# Altium PCB CCP_PCB.PcbDoc
Units mil, origin at the board's own origin, x right, y up, seen from the top; angles counter-clockwise.
Board outline 6000 x 4000 mil, 2 copper layers (Top Layer, Bottom Layer); 58 components, 52 nets, 259 pads, 7 vias.
Unrouted connection lines stored in the file: 34.
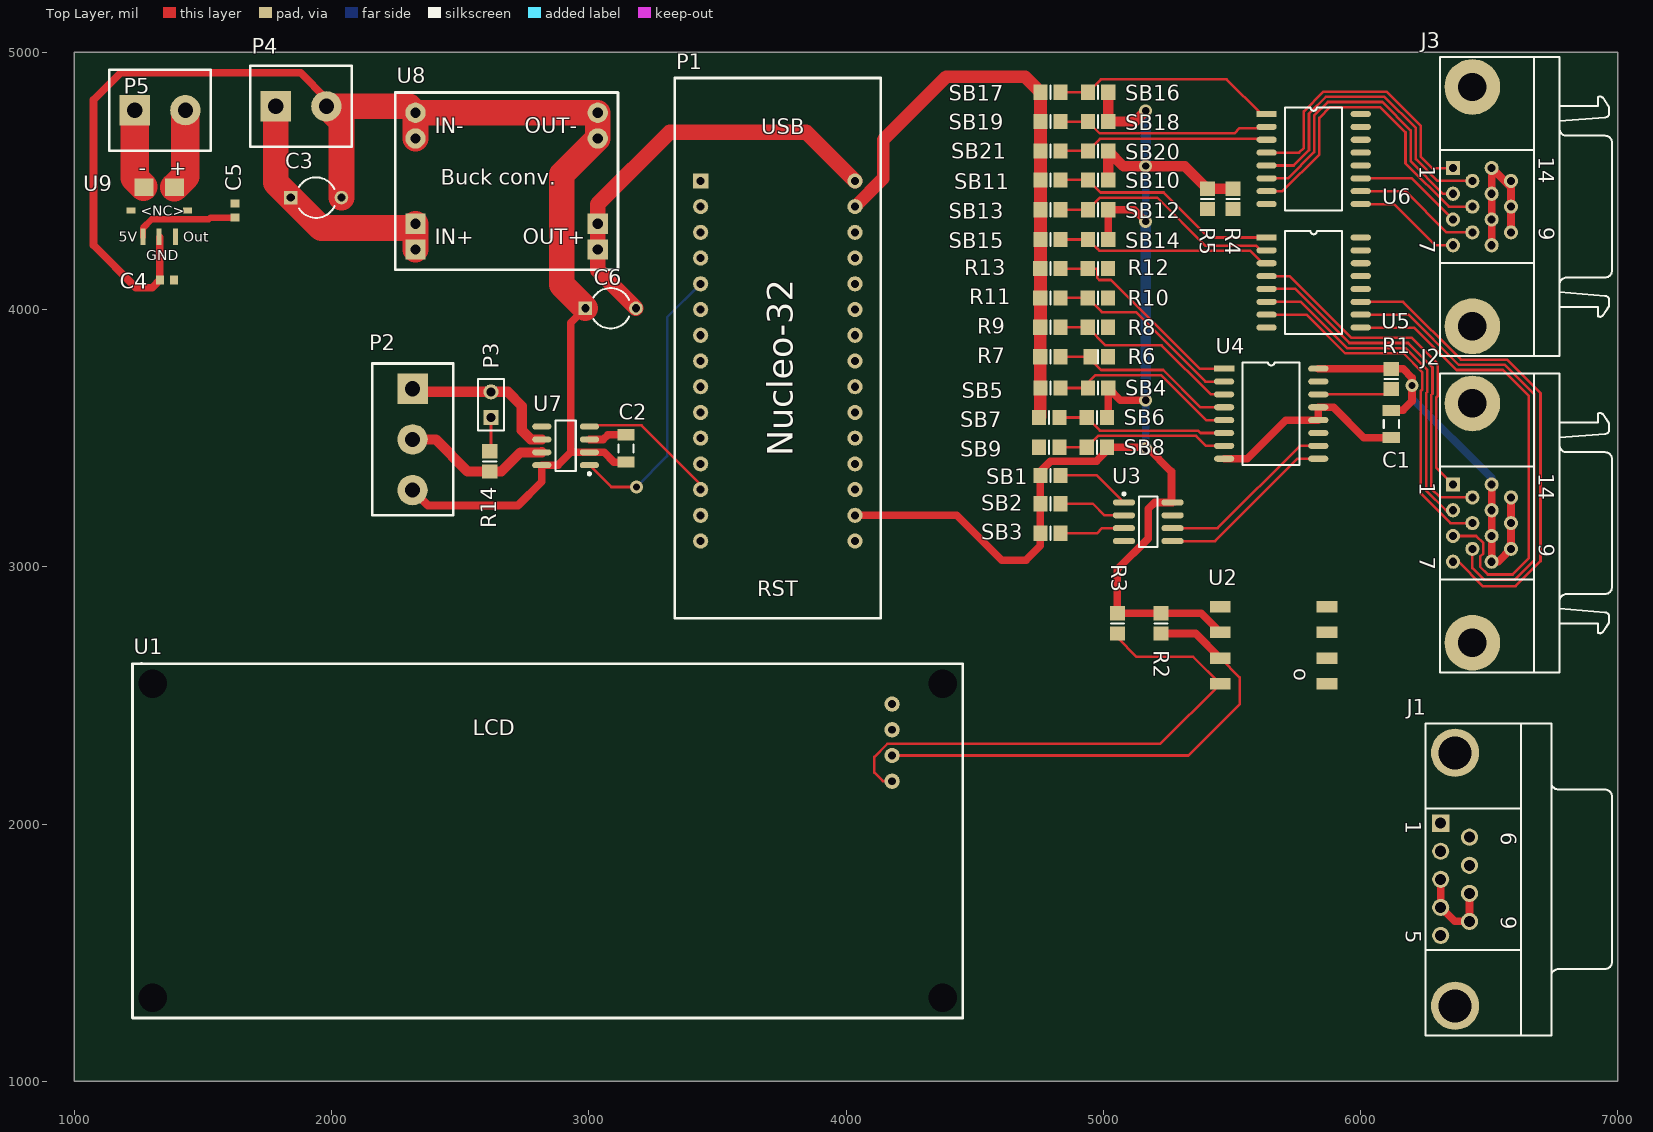
[diagram p0: Top Layer view]
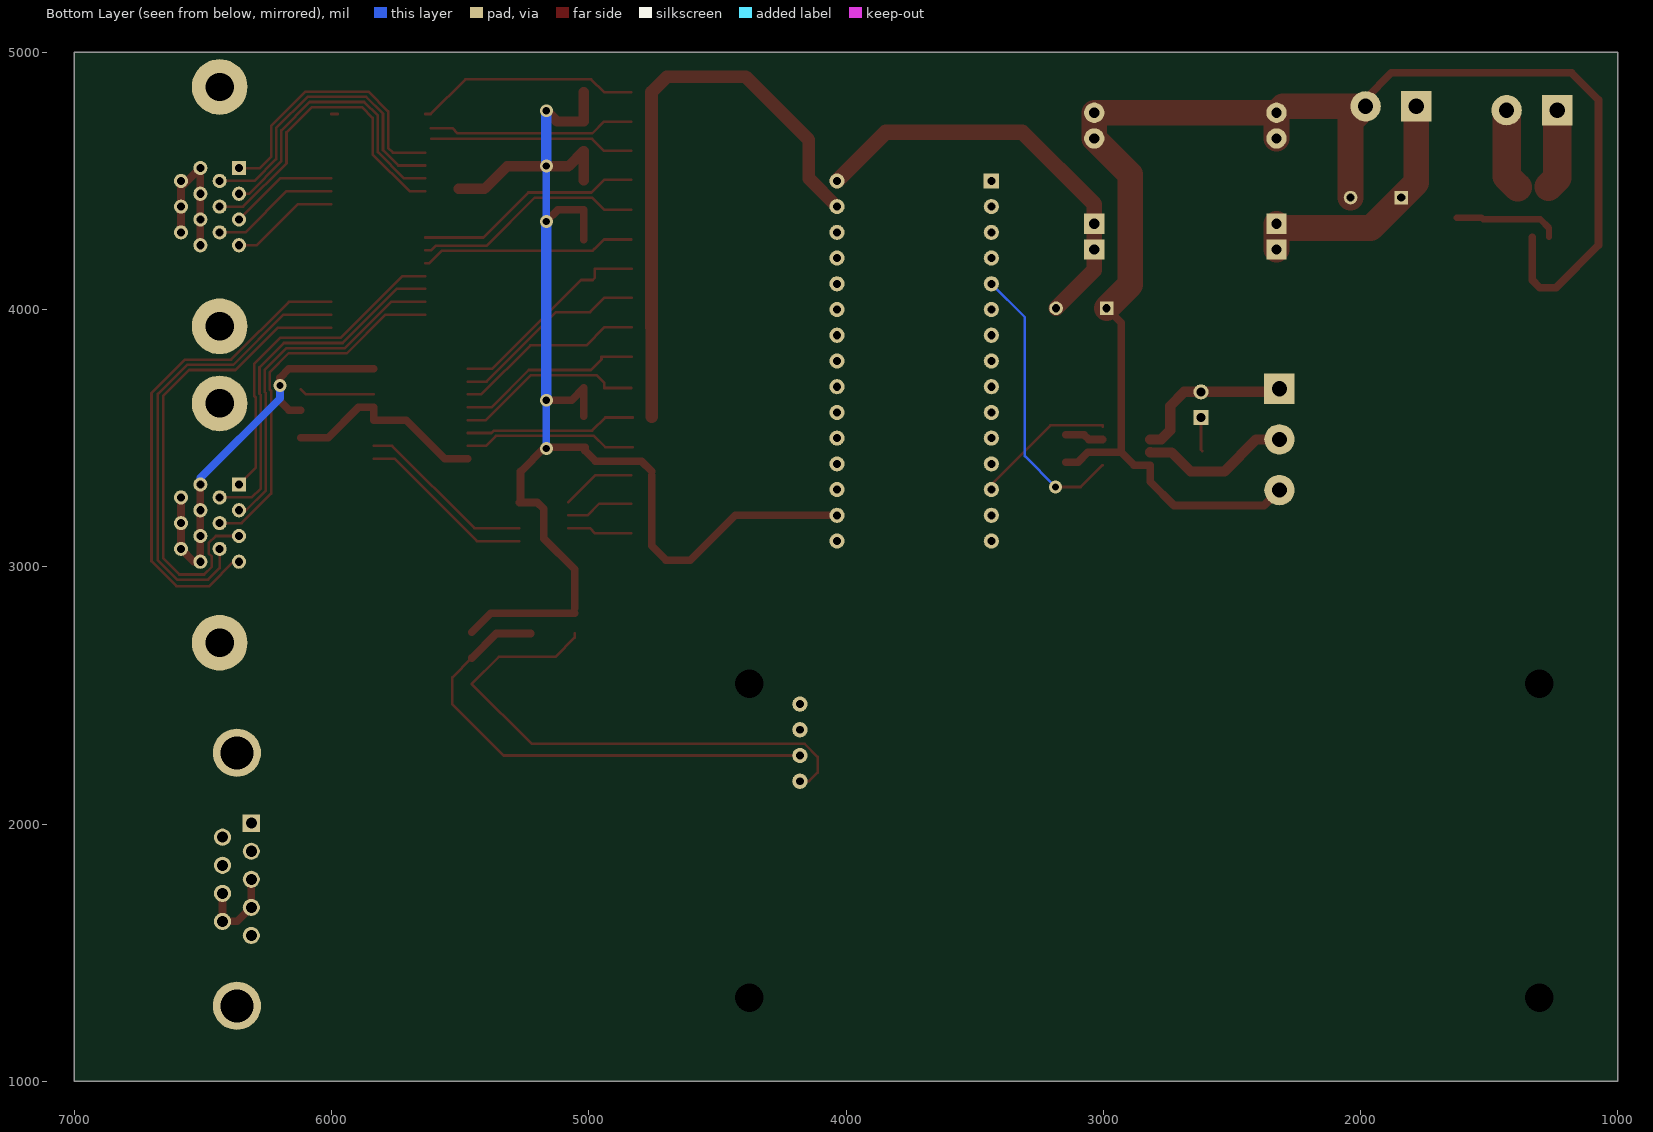
[diagram p1: Bottom Layer view, seen from below]

## Layer stack, top to bottom
Top Solder: solder mask 0.4, Solder Resist, Dk 3.5
Top Layer: signal copper 1.4
Dielectric 1: dielectric 12.6, FR-4, Dk 4.8
Bottom Layer: signal copper 1.4
Bottom Solder: solder mask 0.4, Solder Resist, Dk 3.5

## Board outline
1000,1000 7000,1000 7000,5000 1000,5000

## Design rules (kind name [scope] priority, off if disabled: settings)
Clearance [All] p1: gap=10 ignorepadtopadclearanceinfootprint=FALSE except(0: Arc-Hole Track-Hole SMDPad-Hole THPad-Hole Via-Hole Fill-Hole Poly-Hole Region-Hole Text-Hole)
PolygonConnect [All] p1: connectstyle=Relief reliefconductorwidth=10 reliefentries=4 polygonreliefangle="90 Angle" airgapwidth=10
RoomDefinition CCP_Power_CAN [InComponentClass('CCP_Power_CAN')] p1: confinementstyle=ConfineIn formatcopy=TRUE lockcomponents=FALSE outline 745,630.77 7120,630.77 7120,5100 745,5100
RoomDefinition CCP_I2C [InComponentClass('CCP_I2C')] p2: confinementstyle=ConfineIn formatcopy=TRUE lockcomponents=FALSE outline 330,795 7170,795 7170,5315 330,5315
RoutingVias [All] p1: holewidth=28 width=50 viastyle="Through Hole" minholewidth=28 minwidth=50 maxholewidth=28 maxwidth=50
SolderMaskExpansion [All] p1: expansion=4
Width [All] p1: maxlimit=150 minlimit=10 preferedwidth=10 minimp=50.000000 maximp=50.000000 favimp=50.000000
30 further rules are at their usual default settings.

## Classes and differential pairs
component class CCP_Power_CAN: C2 C3 C4 C5 C6 P2 P3 P4 P5 R14 U7 U8 U9
component class CCP_I2C: C1 J1 J2 J3 P1 R1 R2 R3 R4 R5 R6 R7 R8 R9 R10 R11 R12 R13 SB1 SB2 SB3 SB4 SB5 SB6 SB7 SB8 SB9 SB10 SB11 SB12 SB13 SB14 SB15 SB16 SB17 SB18 SB19 SB20 SB21 U1 U2 U3 U4 U5 U6

## Components (designator, comment, footprint, x,y, rotation, side; value= is the part's Value field where it differs from the comment)
C1 "Cap" C1206 6120,3555 r90 top value=10uF
C2 "Cap" C1206 3145,3460 r90 top value=10uF
C3 "Cap" CAPR5-4X5 1940,4435 r0 top value=220uF
C4 "Cap Semi" 1608[0603] 1360,4115 r0 top value=100pF
C5 "Cap Semi" 1608[0603] 1625,4385 r90 top value=.1uF
C6 "Cap" CAPR5-4X5 3085,4005 r0 top value=10uF
J1 "D Connector 9" DSUB1.385-2H9 6741.89,1785 r270 top
J2 "Connector 14" CHAMP1.27-2H14A 6773.39,3169.65 r270 top
J3 "Connector 14" CHAMP1.27-2H14A 6773.39,4400 r270 top
P1 "NUCLEO-L432KC" NUCLEO-32 3435,4500 r0 top
P2 "CAN" "3POS TERM BLOCK" 2315,3691.85 r270 top
P3 "TERM" HDR1X2 2620,3580 r90 top
P4 "Battery Input" "2POS TERM BLOCK" 1783.15,4790 r0 top
P5 "Header 2H" "2POS TERM BLOCK" 1235,4775 r0 top
R1 "Res1" 6-0805_M#1 6120,3730 r270 top value=10K
R2 "Res1" 6-0805_M#1 5225,2780 r90 top value=1K
R3 "Res1" 6-0805_M#1 5055,2780 r90 top value=1K
R4 "Res1" 6-0805_M#1 5505,4430 r90 top value=10K
R5 "Res1" 6-0805_M#1 5405,4430 r90 top value=10K
R6 "Res1" 6-0805_M#2 4979.37,3816.54 r0 top value=300
R7 "Res1" 6-0805_M#1 4794.37,3816.54 r0 top value=300
R8 "Res1" 6-0805_M#1 4979.37,3930.77 r0 top value=100
R9 "Res1" 6-0805_M#1 4794.37,3930.77 r0 top value=150
R10 "Res1" 6-0805_M#1 4979.37,4045 r0 top value=100
R11 "Res1" 6-0805_M#1 4794.37,4045 r0 top value=150
R12 "Res1" 6-0805_M#1 4979.37,4159.23 r0 top value=100
R13 "Res1" 6-0805_M#1 4794.37,4159.23 r0 top value=150
R14 "Res1" 6-0805_M#1 2615,3410 r270 top value=120
SB1 "Res1" 6-0805_M#1 4795,3355 r180 top value=0
SB2 "Res1" 6-0805_M#1 4795,3245 r180 top value=0
SB3 "Res1" 6-0805_M#1 4795,3130 r180 top value=0
SB4 "Res1" 6-0805_M#1 4980,3695 r0 top value=0
SB5 "Res1" 6-0805_M#1 4795,3695 r0 top value=0
SB6 "Res1" 6-0805_M#1 4975,3580.38 r0 top value=0
SB7 "Res1" 6-0805_M#1 4790,3580.38 r0 top value=0
SB8 "Res1" 6-0805_M#1 4975,3464.61 r0 top value=0
SB9 "Res1" 6-0805_M#1 4790,3464.61 r0 top value=0
SB10 "Res1" 6-0805_M#1 4980,4503.85 r0 top value=0
SB11 "Res1" 6-0805_M#1 4795,4503.85 r0 top value=0
SB12 "Res1" 6-0805_M#1 4980,4388.08 r0 top value=0
SB13 "Res1" 6-0805_M#1 4795,4388.08 r0 top value=0
SB14 "Res1" 6-0805_M#1 4980,4272.31 r0 top value=0
SB15 "Res1" 6-0805_M#1 4795,4272.31 r0 top value=0
SB16 "Res1" 6-0805_M#1 4980,4845 r0 top value=0
SB17 "Res1" 6-0805_M#1 4795,4845 r0 top value=0
SB18 "Res1" 6-0805_M#1 4980,4730.77 r0 top value=0
SB19 "Res1" 6-0805_M#1 4795,4730.77 r0 top value=0
SB20 "Res1" 6-0805_M#1 4980,4616.54 r0 top value=0
SB21 "Res1" 6-0805_M#1 4795,4616.54 r0 top value=0
U1 "LCD Display" B01LC8HZ2O 1226.26,2623.74 r0 top
U2 "SSCMNNN030PA2A3" 8-SMT 5869.96,2845 r270 top
U3 "CAT24C32" SO8_N 5175,3175 r0 top
U4 "PCF8591" 16-SOIC 5470,3770 r0 top
U5 "PCF8574" 16-SOIC 5635,4280 r0 top
U6 "PCF8574" 16-SOIC 5635,4760 r0 top
U7 "MCP2561" SO8_L 2910,3470 r180 top
U8 "MP1584EN Breakout Board" "MP1584EN Breakout" 2326.34,4765 r0 top
U9 "ACS780xLR" "7-pin PSOF" 1330,4385 r0 top

## Footprints (in the part's own frame and the unit in brackets; to place one, negate y for a bottom-side part, rotate by r counter-clockwise, add the part's x,y. Pads: shape width x height; smd on the part's side, far side on the other; paste and mask are expansions set on the pad)
"2POS TERM BLOCK" [mm] "5mm Pitch"
  rect 3x3 hole 1.5: 1(0,0)
  round 3 hole 1.5: 2(5,0)
  silkscreen extent -2.5,-4 7.5,4, body extent -2.51,-4.57 8.09,4.43, height 12.6
"3POS TERM BLOCK" [mm] "5mm Pitch"
  rect 3x3 hole 1.5: 1(0,0)
  round 3 hole 1.5: 2(5,0) 3(10,0)
  silkscreen extent -2.5,-4 12.5,4, body extent -3.03,-4.56 12.49,4.44, height 12.6
6-0805_M#1 [mm] "Chip Resistor, Body 2.0x1.2mm, IPC Low Density"
  rect 1.4x1.5 smd: 1(-1,0) 2(1,0)
  silkscreen extent 0,-0.65 0,0.65, body extent -1.07,-0.7 1.07,0.7, height 0.7
6-0805_M#2 [mm] "Chip Resistor, Body 2.0x1.2mm, IPC Low Density"
  rect 1.4x1.5 smd: 1(-0.73,0) 2(1,0)
  silkscreen extent 0,-0.65 0,0.65, body extent -1.07,-0.7 1.07,0.7, height 0.7
"7-pin PSOF" [mm] "ACS780xLR"
  rect 0.5x1.6 smd: 1(-1.6,-2.6) 2(0,-2.6) 3(1.6,-2.6)
  rect 0.9x0.6 smd: 4(2.8,0) 7(-2.8,0)
  rect 1.9x1.7 smd: 5(1.5,2.3) 6(-1.5,2.3)
8-SMT [mm]
  rect 1.15x2.04 smd: 1(0,-10.54) 2(2.54,-10.54) 3(5.08,-10.54) 4(7.62,-10.54) 5(7.62,0) 6(5.08,0) 7(2.54,0) 8(0,0)
  body extent -1.35,-12 8.55,1.46, height 5.44
16-SOIC [mm]
  rect 2x0.6 smd: 1(0,0)
  oval 2x0.6 smd: 2(0,-1.27) 3(0,-2.54) 4(0,-3.81) 5(0,-5.08) 6(0,-6.35) 7(0,-7.62) 8(0,-8.89) 9(9.3,-8.89) 10(9.3,-7.62) 11(9.3,-6.35) 12(9.3,-5.08) 13(9.3,-3.81) 14(9.3,-2.54) 15(9.3,-1.27) 16(9.3,0)
  silkscreen extent 1.84,-9.53 7.46,0.64
1608[0603] [mm] "Chip Capacitor, Body 1.6x0.8mm, IPC High Density"
  rect 0.8x0.9 smd: 1(-0.7,0) 2(0.7,0)
  body extent -0.87,-0.48 0.87,0.48, height 1.3
B01LC8HZ2O [mil]
  round 60 hole 30: 1(2952.76,-157.48) 2(2952.76,-257.48) 3(2952.76,-357.48) 4(2952.76,-457.48)
  round 60 hole 112.01 unplated: 9(78.74,-1299.21) 9(78.74,-78.74) 9(3149.61,-1299.21) 9(3149.61,-78.74)
  silkscreen extent 0,-1378 3228,1
C1206 [mm] "Chip Capacitor, Body 3.2x1.6mm, IPC High Density"
  rect 1.1x1.7 smd: 1(-1.35,0) 2(1.35,0)
  silkscreen extent -0.4,-0.75 0.4,0.75, body extent -1.7,-0.9 1.7,0.9, height 1.3
CAPR5-4X5 [mm] "Capacitor; 2 Leads"
  rect 1.35x1.35 hole 0.8: 1(-2.5,0)
  round 1.35 hole 0.8: 2(2.5,0)
  silkscreen extent -1.69,-2 1.82,2
CHAMP1.27-2H14A [mm] "Connector; 14 Position; Right Angle; Pitch 1.27 mm"
  rect 1.4x1.4 hole 0.8: 1(-3.81,-10.5)
  round 1.4 hole 0.8: 2(-2.54,-8.595) 3(-1.27,-10.5) 4(0,-8.595) 5(1.27,-10.5) 6(2.54,-8.595) 7(3.81,-10.5) 8(3.81,-6.69) 9(2.54,-4.785) 10(1.27,-6.69) 11(0,-4.785) 12(-1.27,-6.69) 13(-2.54,-4.785) 14(-3.81,-6.69)
  round 5.5 hole 2.8: 15(-11.82,-8.595) 16(11.82,-8.595)
  silkscreen extent -14.77,-11.8 14.77,5.2
DSUB1.385-2H9 [mm] "Connector; D Subminiature; 9 Position; Right Angle; Pitch 1.385 mm"
  rect 1.69x1.69 hole 1.09: 1(-5.54,-10.92)
  round 1.69 hole 1.09: 2(-2.77,-10.92) 3(0,-10.92) 4(2.77,-10.92) 5(5.54,-10.92) 6(-4.155,-8.08) 7(-1.385,-8.08) 8(1.385,-8.08) 9(4.155,-8.08)
  round 4.76 hole 3.26: 10(-12.495,-9.5) 11(12.495,-9.5)
  silkscreen extent -15.4,-12.4 15.4,6
HDR1X2 [mm] "Connector; Header; 2 Position"
  rect 1.5x1.5 hole 0.9: 1(0,0)
  round 1.5 hole 0.9: 2(2.54,0)
  silkscreen extent -1.27,-1.27 3.81,1.27
"MP1584EN Breakout" [mm] "Buck Converter"
  round 2 hole 1: 0(0,-2.54) 0(0,0) 2(18,-2.54) 2(18,0)
  rect 2x2 hole 1: 1(0,-13.5) 1(0,-10.96) 3(18,-13.5) 3(18,-10.96)
  silkscreen extent -2,-15.5 20,2
NUCLEO-32 [mm]
  rect 1.5x1.5 hole 0.8: 1(0,0)
  round 1.5 hole 0.8: 2(0,-2.54) 3(0,-5.08) 4(0,-7.62) 5(0,-10.16) 6(0,-12.7) 7(0,-15.24) 8(0,-17.78) 9(0,-20.32) 10(0,-22.86) 11(0,-25.4) 12(0,-27.94) 13(0,-30.48) 14(0,-33.02) 15(0,-35.56) 16(15.24,-35.56) 17(15.24,-33.02) 18(15.24,-30.48) 19(15.24,-27.94) 20(15.24,-25.4) 21(15.24,-22.86) 22(15.24,-20.32) 23(15.24,-17.78) 24(15.24,-15.24) 25(15.24,-12.7) 26(15.24,-10.16) 27(15.24,-7.62) 28(15.24,-5.08) 29(15.24,-2.54) 30(15.24,0)
  silkscreen extent -2.54,-43.18 17.78,10.16, body extent -1.67,-40.6 16.87,9.69, height 5
SO8_L [mm] "SOIC, 8-Leads, Body 4.9x3.9mm, Pitch 1.27mm, IPC High Density"
  oval 1.9x0.6 smd: 1(-2.35,1.905) 2(-2.35,0.635) 3(-2.35,-0.635) 4(-2.35,-1.905) 5(2.35,-1.905) 6(2.35,-0.635) 7(2.35,0.635) 8(2.35,1.905)
  silkscreen extent -2.48,-2.5 1,2.88, body extent -2,-2.5 2,2.5, height 1.75
SO8_N [mm] "SOIC, 8-Leads, Body 4.9x3.9mm, Pitch 1.27mm, IPC Medium Density"
  oval 2.2x0.6 smd: 1(-2.4,1.905) 2(-2.4,0.635) 3(-2.4,-0.635) 4(-2.4,-1.905) 5(2.4,-1.905) 6(2.4,-0.635) 7(2.4,0.635) 8(2.4,1.905)
  silkscreen extent -2.52,-2.5 0.9,2.88, body extent -2,-2.5 2,2.5, height 1.75

## Part data
C1 C2 C3 C6: "Capacitor", LatestRevisionDate=17-Jul-2002, LatestRevisionNote="Re-released for DXP Platform.", PackageDescription="Radial Cap, Thru-Hole; 2 Leads; 0.3 in Pin Spacing", PackageReference=RAD-0.3, Published=8-Jun-2000, Publisher="Altium Limited"
C4 C5: "Capacitor (Semiconductor SIM Model)", LatestRevisionDate=29-May-2009, LatestRevisionNote="IPC-7351 Footprint Added.", PackageDescription="Chip Capacitor", PackageReference=C1206, Published=8-Jun-2000, Publisher="Altium Limited"
J1: "Receptacle Assembly, 9 Position, Right Angle", PackageDocument=O, DatasheetDocument=1-Sep-1999, Gender=Receptacle, LatestRevisionDate=17-Jul-2002, LatestRevisionNote="Re-released for DXP Platform.", Orientation="Right Angle", PackageReference=788750, Positions=9, Published=15-Jun-2001, Publisher="Altium Limited"
J2 J3: "Receptacle Header Assemby", PackageDocument=B, DatasheetDocument=1-Oct-1983, LatestRevisionDate=17-Jul-2002, LatestRevisionNote="Re-released for DXP Platform.", Orientation="Right Angle", PackageReference=178240-1, Positions=14, Published=15-Jun-2001, Publisher="Altium Limited"
P1: "STM32L432KC Development Board", ComponentLink1Description=MBED, ComponentLink1URL=https://os.mbed.com/platforms/ST-Nucleo-L432KC/, ComponentLink2Description=Digikey, ComponentLink2URL=https://www.digikey.com/products/en?keywords=NUCLEO-L432KC
P3 P4: library part "Header 2", "Header, 2-Pin", LatestRevisionDate=17-Jul-2002, LatestRevisionNote="Re-released for DXP Platform.", Publisher="Altium Limited"
P5: "Header, 2-Pin, Right Angle", LatestRevisionDate=17-Jul-2002, LatestRevisionNote="Re-released for DXP Platform.", Publisher="Altium Limited"
R1 R2 R3 R4 R5 R6 R7 R8 R9 R10 R11 R12 R13 R14 SB1 SB2 SB3 SB4 SB5 SB6 SB7 SB8 SB9 SB10 SB11 SB12 SB13 SB14 SB15 SB16 SB17 SB18 SB19 SB20 SB21: "Resistor", LatestRevisionDate=17-Jul-2002, LatestRevisionNote="Re-released for DXP Platform.", PackageDescription="Axial Device, Thru-Hole; 2 Leads; 0.3 in Pin Spacing", PackageReference=AXIAL-0.3, Published=8-Jun-2000, Publisher="Altium Limited"
U1: library part B01LC8HZ2O, ComponentLink1Description=Part, ComponentLink1URL=https://www.amazon.in/Industry-Interface-Display-Character-MEGA2560/dp/B01LC8HZ2O
U2: "Honeywell Digital Pressure Sensor", ComponentLink1Description=Part, ComponentLink1URL=https://www.digikey.com/product-detail/en/honeywell-sensing-and-productivity-solutions/SSCMNNN030PA2A3/480-6407-ND/2416123, ComponentLink2Description=Datasheet, ComponentLink2URL=https://sensing.honeywell.com/index.php?ci_id=151134
U3: "I2C EEPROM", ComponentLink1Description=Part, ComponentLink1URL=https://www.digikey.com/product-detail/en/on-semiconductor/CAT24C32WI-GT3/CAT24C32WI-GT3CT-ND/1631159, ComponentLink2Description=Datasheet, ComponentLink2URL=http://www.onsemi.com/pub/Collateral/CAT24C32-D.PDF
U4: "8-bit A/D and D/A", ComponentLink1Description=Part, ComponentLink1URL=https://www.digikey.com/product-detail/en/nxp-usa-inc/PCF8591T-2518/568-1088-1-ND/735798, ComponentLink2Description=Datasheet, ComponentLink2URL=https://www.nxp.com/docs/en/data-sheet/PCF8591.pdf
U5 U6: "I2C I/O Expander", ComponentLink1Description=Part, ComponentLink1URL=https://www.digikey.com/product-detail/en/texas-instruments/PCF8574DWR/296-13108-1-ND/484579, ComponentLink2Description=Datasheet, ComponentLink2URL=http://www.ti.com/lit/ds/symlink/pcf8574.pdf
U7: "CAN Transciever", ComponentLink1Description=Part, ComponentLink1URL=https://www.digikey.com/product-detail/en/microchip-technology/MCP2561-E-SN/MCP2561-E-SN-ND/4079961, ComponentLink2Description=Datasheet, ComponentLink2URL=http://ww1.microchip.com/downloads/en/DeviceDoc/20005167C.pdf
U8: "Buck Converter", ComponentLink1Description=Part, ComponentLink1URL=https://www.amazon.com/eBoot-MP1584EN-Converter-Adjustable-Module/dp/B01MQGMOKI/
U9: "Hall-Effect Current Sensor", ComponentLink1Description=Part, ComponentLink1URL=https://www.digikey.com/product-detail/en/allegro-microsystems-llc/ACS780LLRTR-050B-T/620-1817-1-ND/6189106

## Via types
v1: diameter 50, hole 28, Top Layer to Bottom Layer, 7 vias

## Nets (pads, with @x,y where several pads share a name; then routed paths per layer and width w, separated by ;. In a path a pad name is that pad's centre, name@x,y a point inside that pad or via, vN(x,y) a via of type N, cw(c..) or ccw(c..) an arc to the next point about the centre after c; other vN are vias at no path point)
3V3: C1.2 J2.8 J2.9 J2.10 J2.11 J2.12 J2.13 J2.14 J3.8 J3.9 J3.10 J3.11 J3.12 J3.13 J3.14 P1.17 R1.1 R2.2 R3.2 R4.2 R5.2 SB1.2 SB2.2 SB3.2 SB4.2 SB6.2 SB8.2 SB10.2 SB12.2 SB14.2 SB16.2 SB18.2 SB20.2 U1.2 U2.2 U3.8 U4.16 U5.16 U6.16 | length 7888.9
  Top Layer w10: SB1.2 SB1.2@4755.63,3370.63 ; SB6.2 SB6.2@5019.37,3585.38 ; U3.8@5265,3254.49 U3.8 ; U6.16@5975,4760 U6.16 ; R1.1@6119.37,3770 R1.1 ; J2.8 J2.8@6535,3019.65
  Top Layer w30: P1.17 4430,3200 4605,3025 4699.37,3025 4755.63,3081.26 SB3.2 SB2.2 SB1.2 ; SB1.2@4755.63,3370.63 4795,3410 4973.46,3410 5014.37,3450.91 SB8.2 5170.39,3464.61 5265,3370 U3.8@5265,3254.49 ; SB6.2@5019.37,3585.38 SB4.2 5066.87,3647.5 v1(5165,3647.5) ; SB14.2 SB12.2 5119.42,4388.08 v1(5165,4342.5) ; R3.2 R2.2 5380.63,2819.37 U2.2 ; R3.2@5055,2838.74 5055,2990 5175,3110 5175,3225 5200,3250 U3.8 ; U4.16 R1.1@6119.37,3770 ; C1.2 6165.08,3608.15 6200,3643.07 v1(6200,3705) 6200,3735 6165.63,3769.37 R1.1 ; J2.8 J2.10 J2.12 J2.14 ; J3.8 J3.10 J3.12 J3.14 6585,4475 J3.11 J3.9 ; J2.8@6535,3019.65 J2.9 J2.11 J2.13
  Top Layer w40: SB10.2@5019.37,4502.31 SB10.2 SB20.2 5078.41,4557.5 v1(5165,4557.5) 5316.87,4557.5 R5.2 R4.2 ; SB16.2 SB18.2 5123.27,4730.77 v1(5165,4772.5)
  Bottom Layer w10: J2.14 J2.14@6510,3345
  Bottom Layer w30: v1(5165,3460) v1(5165,3647.5) ; v1(5165,4342.5) v1(5165,4557.5) ; v1(6200,3705) 6200,3655 J2.14@6510,3345
  Bottom Layer w40: v1(5165,3647.5) 5165,4127.5 v1(5165,4342.5) ; v1(5165,4557.5) v1(5165,4772.5)
5V: C2.2 C5.1 J1.3 J1.4 J1.8 J1.9 P1.27 U7.3 U9.1 | length 911.6
  Top Layer w25: U9.1 1267.01,4317.01 1300.69,4350.69 1523.25,4350.69 1530,4357.44 C5.1
  Top Layer w30: U7.3 3056.85,3495 3075,3513.15 C2.2 ; J1.3 J1.4 6366.5,1621.42 J1.9 J1.8
ADC2_A0: SB4.1 SB5.2 U4.5 | length 740.9
  Top Layer w10: SB5.2 SB4.1 4940.63,3715.63 4970,3745 5225,3745 5400,3570 U4.5
ADC2_A1: SB6.1 SB7.2 U4.6 | length 665.6
  Top Layer w10: SB7.2 SB6.1 4986.87,3529.14 5369.14,3529.14 5378.28,3520 U4.6
ADC2_A2: SB8.1 SB9.2 U4.7 | length 675.3
  Top Layer w10: SB9.2 SB8.1 4980.16,3509.14 5360.86,3509.14 5400,3470 U4.7
ADCIN0: R12.1 R13.2 U4.1 | length 818.4
  Top Layer w10: R13.2 R12.1 4976.18,4159.23 4976.18,4123.49 4984.97,4114.7 5030.3,4114.7 5375,3770 U4.1
ADCIN1: R10.1 R11.2 U4.2 | length 770.9
  Top Layer w10: R11.2 R10.1 4995,3990 5126.72,3990 5396.72,3720 U4.2
ADCIN2: R8.1 R9.2 U4.3 | length 744.3
  Top Layer w10: R9.2 R8.1 5009.7,3861.07 5227.37,3861.07 5418.43,3670 U4.3
ADCIN3: R6.1 R7.2 U4.4 | length 723.6
  Top Layer w10: R7.2 R6.1 4950.63,3806.35 4991.98,3765 5233.28,3765 5378.28,3620 U4.4
CAN1_RX: P1.13 U7.4 | length 552.5
  Top Layer w10: U7.4 3002.52,3549.8 3205.2,3549.8 3435,3320 P1.13
CAN1_TX: P1.5 U7.1 | length 1111.2
  Top Layer w10: U7.1 3087.52,3310 v1(3185,3310)
  Bottom Layer w10: v1(3185,3310) 3305,3430 3305,3970 P1.5
CURR_SENSE: C4.2 P1.23 U9.3
GND: C1.1 C2.1 C3.2 C4.1 C5.2 C6.1 P1.4 P1.29 P2.3 P4.2 R7.1 R9.1 R11.1 R13.1 SB5.1 SB7.1 SB9.1 SB11.1 SB13.1 SB15.1 SB17.1 SB19.1 SB21.1 U1.1 U2.1 U3.4 U4.8 U4.12 U4.13 U5.8 U6.8 U7.2 U7.8 U8.0 U8.2 U9.2 | length 9301.8
  Top Layer w10: U9.2 U9.2@1332.44,4280.2 ; SB7.1 SB7.1@4755,3584.75
  Top Layer w30: U9.2@1332.44,4280.2 C4.1 1302.44,4085 1240,4085 1075,4250 1075,4815 1180,4920 1880,4920 1980,4820 P4.2 ; P2.3 2375,3238.15 2725,3238.15 2817.48,3330.63 U7.8@2817.48,3393.19 ; U7.8 2880,3395 2930,3445 ; C6.1 2930,3948.43 2930,3445 ; C2.1 3098.15,3406.85 3060,3445 U7.2 2930,3445 ; U4.8 5560,3420 5710,3570 U4.12 U4.13 5895,3620 6013.15,3501.85 C1.1
  Top Layer w50: P1.29 4145,4510 4145,4660 4390,4905 4695.63,4905 SB17.1 SB19.1 SB21.1 SB11.1 SB13.1 SB15.1 R9.1@4755.63,3931.15 ; SB7.1@4755,3584.75 R7.1 R9.1 R11.1
  Top Layer w100: C3.2 2038.43,4731.57 P4.2 2301.34,4790 U8.0@2326.34,4765 ; U8.0@2326.34,4665 U8.0@2326.34,4765 ; C6.1 2895,4096.57 2895,4525 3035,4665 3035,4765 U8.0@2326.34,4765
GPIO0: J3.1 U6.4 | length 1099.3
  Top Layer w10: U6.4 5761.72,4610 5780,4628.28 5780,4770 5856.81,4846.81 6101.47,4846.81 6235,4713.28 6235,4593.28 6278.28,4550 J3.1
GPIO1: J3.2 U6.5 | length 1199.2
  Top Layer w10: U6.5 5740,4560 5800,4620 5800,4761.72 5865.1,4826.81 6093.19,4826.81 6215,4705 6215,4585 6300,4500 J3.2
GPIO2: J3.3 U6.6 | length 1149
  Top Layer w10: U6.6 5718.28,4510 5820,4611.72 5820,4753.43 5873.38,4806.81 6084.9,4806.81 6195,4696.72 6195,4576.72 6321.72,4450 J3.3
GPIO3: J3.4 U6.7 | length 1248.9
  Top Layer w10: U6.7 5696.57,4460 5840,4603.43 5840,4745.15 5881.66,4786.81 6076.62,4786.81 6175,4688.43 6175,4568.43 6343.43,4400 J3.4
GPIO4: J3.7 U6.9 | length 425.1
  Top Layer w10: U6.9 6130,4410 6290,4250 J3.7
GPIO5: J3.6 U6.10 | length 500.1
  Top Layer w10: U6.10 6175,4460 6335,4300 J3.6
GPIO6: J3.5 U6.11 | length 425.1
  Top Layer w10: U6.11 6200,4510 J3.5
I2C1_SCL: P1.1 R3.1 U1.4 U2.4 U3.6 U4.10 U5.14 U6.14 | length 2796
  Top Layer w10: U1.4 4143.74,2166.26 4110,2200 4110,2260.88 4160.38,2311.26 5221.26,2311.26 U2.4 5350,2650 5130,2650 5055,2725 R3.1 ; U3.6 5445,3150 5765,3470 U4.10
I2C1_SDA: P1.2 R2.1 U1.3 U2.3 U3.5 U4.9 U5.15 U6.15 | length 2613.2
  Top Layer w10: U1.3 5331.26,2266.26 5530,2465 5530,2570 U2.3 ; U3.5 5435,3100 5755,3420 U4.9
  Top Layer w30: R2.1 5359.37,2740.63 U2.3
IO1_A0: SB10.1 SB11.2 U5.1 | length 893.3
  Top Layer w10: SB11.2 SB10.1 4989.48,4455 5235,4455 5410,4280 U5.1
IO1_A1: SB12.1 SB13.2 U5.2 | length 905
  Top Layer w10: SB13.2 SB12.1 4987.55,4435 5210,4435 5397.22,4247.78 5595.5,4247.78 5613.28,4230 U5.2
IO1_A2: SB14.1 SB15.2 U5.3 | length 838.9
  Top Layer w10: SB15.2 SB14.1 4976.37,4236.57 4976.81,4236.57 4985.6,4227.78 5571.75,4227.78 5619.52,4180 U5.3
IO2_A0: SB16.1 SB17.2 U6.1 | length 877.3
  Top Layer w10: SB17.2 SB16.1 4990.63,4895 5480,4895 5615,4760 U6.1
IO2_A1: SB18.1 SB19.2 U6.2 | length 807.9
  Top Layer w10: SB19.2 SB18.1 4986.4,4685 5510,4685 5530,4705 U6.2@5615,4705
IO2_A2: SB20.1 SB21.2 U6.3 | length 796.8
  Top Layer w10: SB21.2 SB20.1 4987.28,4663.19 U6.3@5611.81,4663.19
LED0: J2.1 U5.4 | length 1305.2
  Top Layer w10: U5.4 5725,4130 5965,3890 6200,3890 6300,3790 6300,3663.58 6295,3658.58 6295,3384.65 J2.1
LED1: J2.2 U5.5 | length 1418.1
  Top Layer w10: U5.5 5746.72,4080 5956.72,3870 6185,3870 6280,3775 6280,3671.86 6275,3666.86 6275,3305 6310.35,3269.65 J2.2
LED2: J2.3 U5.6 | length 1342
  Top Layer w10: U5.6 5768.43,4030 5948.43,3850 6175,3850 6260,3765 6260,3680.15 6255,3675.15 6255,3296.72 6332.07,3219.65 J2.3
LED3: J2.4 U5.7 | length 1419.4
  Top Layer w10: U5.7 5790.15,3980 5940.15,3830 6166.72,3830 6240,3756.72 6240,3688.43 6235,3683.43 6235,3284.46 6349.81,3169.65 J2.4
LED4: J2.5 U5.9 | length 1849.2
  Top Layer w10: U5.9 6208.75,3930 6373.75,3765 6553.43,3765 6655,3663.43 6655,3033.28 6591.72,2970 6495,2970 6465,3000 6465,3039.46 6477.56,3052.02 6477.56,3091.9 6449.81,3119.65 J2.5
LED5: J2.6 U5.10 | length 1812.6
  Top Layer w10: U5.10 6187.03,3980 6382.03,3785 6561.72,3785 6675,3671.72 6675,3025 6600,2950 6480,2950 6435,2995 J2.6
LED6: J2.7 U5.11 | length 1918.5
  Top Layer w10: U5.11 6165.32,4030 6390.32,3805 6570,3805 6700,3675 6700,3021.72 6603.28,2925 6475,2925 6380.35,3019.65 J2.7
LV_BATT+: C3.1 P4.1 U8.1 | length 1020
  Top Layer w100: P4.1 1783.15,4493.43 C3.1 1960,4316.57 2309.41,4316.57 2326.34,4333.5 U8.1@2326.34,4233.5
NetJ1_1: J1.1 R12.2
NetJ1_2: J1.2 R8.2
NetJ1_6: J1.6 R10.2
NetJ1_7: J1.7 R6.2
NetP2_1: P2.1 P3.2 U7.6 | length 639.7
  Top Layer w40: P2.1 2326.85,3680 P3.2 2685,3680 2740,3625 2740,3530 2775,3495 U7.6
NetP2_2: P2.2 R14.2 U7.7 | length 585.1
  Top Layer w40: P2.2 2405,3495 2530,3370 R14.2@2615,3370 ; R14.2 2660.63,3370.63 2734.5,3444.5 2816.98,3444.5 U7.7
NetP3_1: P3.1 R14.1 | length 132.7
  Top Layer w10: R14.1 2620,3454.37 P3.1
NetR1_2: R1.2 U4.14 | length 292.4
  Top Layer w10: U4.14 6099.37,3670 R1.2
NetR4_1: R4.1 U5.13
NetR5_1: R5.1 U6.13
NetSB1_1: SB1.1 U3.1 | length 289.6
  Top Layer w10: SB1.1 4975.51,3355 U3.1
NetSB2_1: SB2.1 U3.2 | length 264.8
  Top Layer w10: SB2.1 4960,3245 5005,3200 U3.2
NetSB3_1: SB3.1 U3.3 | length 254.4
  Top Layer w10: SB3.1 4975,3130 4995,3150 U3.3
VBAT+: P5.2 U9.5 | length 317.2
  Top Layer w110: U9.5 1431.85,4518.35 P5.2
VBAT-: P5.1 U9.6 | length 311.7
  Top Layer w110: P5.1 1235,4511.5 U9.6@1269.06,4477.44
VIN: C6.2 P1.30 U8.3 | length 1661.2
  Top Layer w60: C6.2 3035,4153.43 3035,4233.5 3035,4333.5 3035,4410 3315,4690 3845,4690 P1.30
pads on no net: J1.5 J1.10 J1.11 J2.15 J2.16 J3.15 J3.16 P1.3 P1.6 P1.7 P1.8 P1.9 P1.10 P1.11 P1.12 P1.14 P1.15 P1.16 P1.18 P1.19 P1.20 P1.21 P1.22 P1.24 P1.25 P1.26 P1.28 U1.9 U2.5 U2.6 U2.7 U2.8 U3.7 U4.11 U4.15 U5.12 U6.12 U7.5 U9.4 U9.7

## Text inside footprints (layer, text, board x,y; h text height)
J1: Top Overlay "6" at 6546.02,1968.27 h59.06 r270; Top Overlay "9" at 6546.02,1641.1 h59.06 r270; Top Overlay "5" at 6175.94,1586.57 h59.06 r270; Top Overlay "1" at 6175.94,2012.95 h59.06 r270
J2: Top Overlay "7" at 6231.06,3039.33 h59.06 r270; Top Overlay "1" at 6231.06,3329.49 h59.06 r270; Top Overlay "14" at 6693.66,3363.94 h59.06 r270; Top Overlay "9" at 6693.66,3089.33 h59.06 r270
J3: Top Overlay "7" at 6231.06,4269.69 h59.06 r270; Top Overlay "1" at 6231.06,4559.84 h59.06 r270; Top Overlay "14" at 6693.66,4594.29 h59.06 r270; Top Overlay "9" at 6693.66,4319.69 h59.06 r270
P1: Top Overlay "Nucleo-32" at 3793.27,3429.13 h100 r90; Top Overlay "RST" at 3655.47,2885.83 h60; Top Overlay "USB" at 3671.22,4681.1 h60
U1: Top Overlay "LCD" at 2548.26,2345.74 h60
U2: Top Overlay "o" at 5740.04,2604.84 h60 r270
U8: Top Overlay "Buck conv." at 2424.76,4485.47 h60; Top Overlay "IN-" at 2401.14,4686.26 h60; Top Overlay "OUT-" at 2751.54,4686.26 h60; Top Overlay "IN+" at 2401.14,4253.19 h60; Top Overlay "OUT+" at 2743.66,4253.19 h60
U9: Top Overlay "-" at 1251.26,4522.8 h60; Top Overlay "+" at 1369.37,4522.8 h60; Top Overlay "<NC>" at 1259.13,4365.31 h39.37; Top Overlay "Out" at 1424.49,4262.95 h39.37; Top Overlay "5V" at 1172.52,4262.95 h39.37; Top Overlay "GND" at 1278.82,4192.09 h39.37